# Altium PCB fpga_radio.PcbDoc
Units mm, origin at the board's own origin, x right, y up, seen from the top; angles counter-clockwise.
Board outline 49.47 x 42.23 mm, 4 copper layers (Top Layer, VCC_3_3, VCC_1_5, Bottom Layer); 60 components, 45 nets, 338 pads, 75 vias.
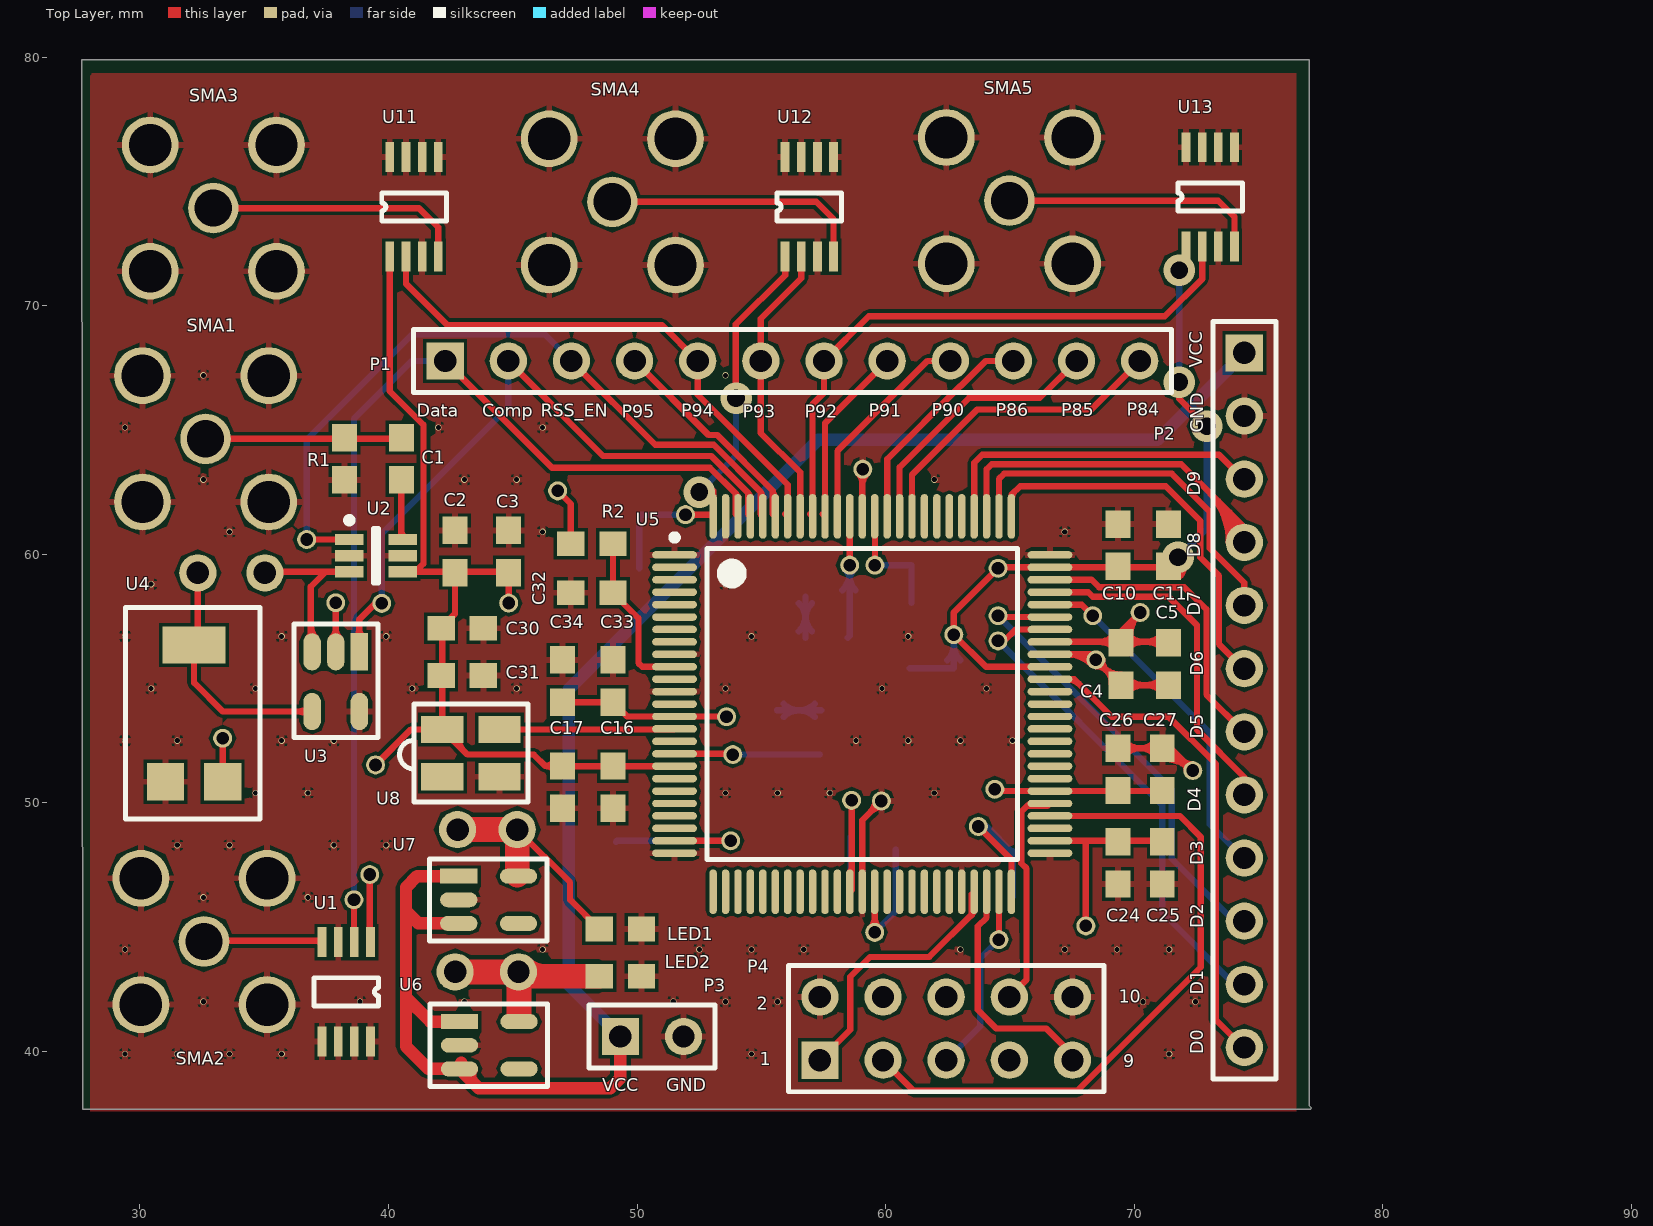
[diagram p0: Top Layer view]
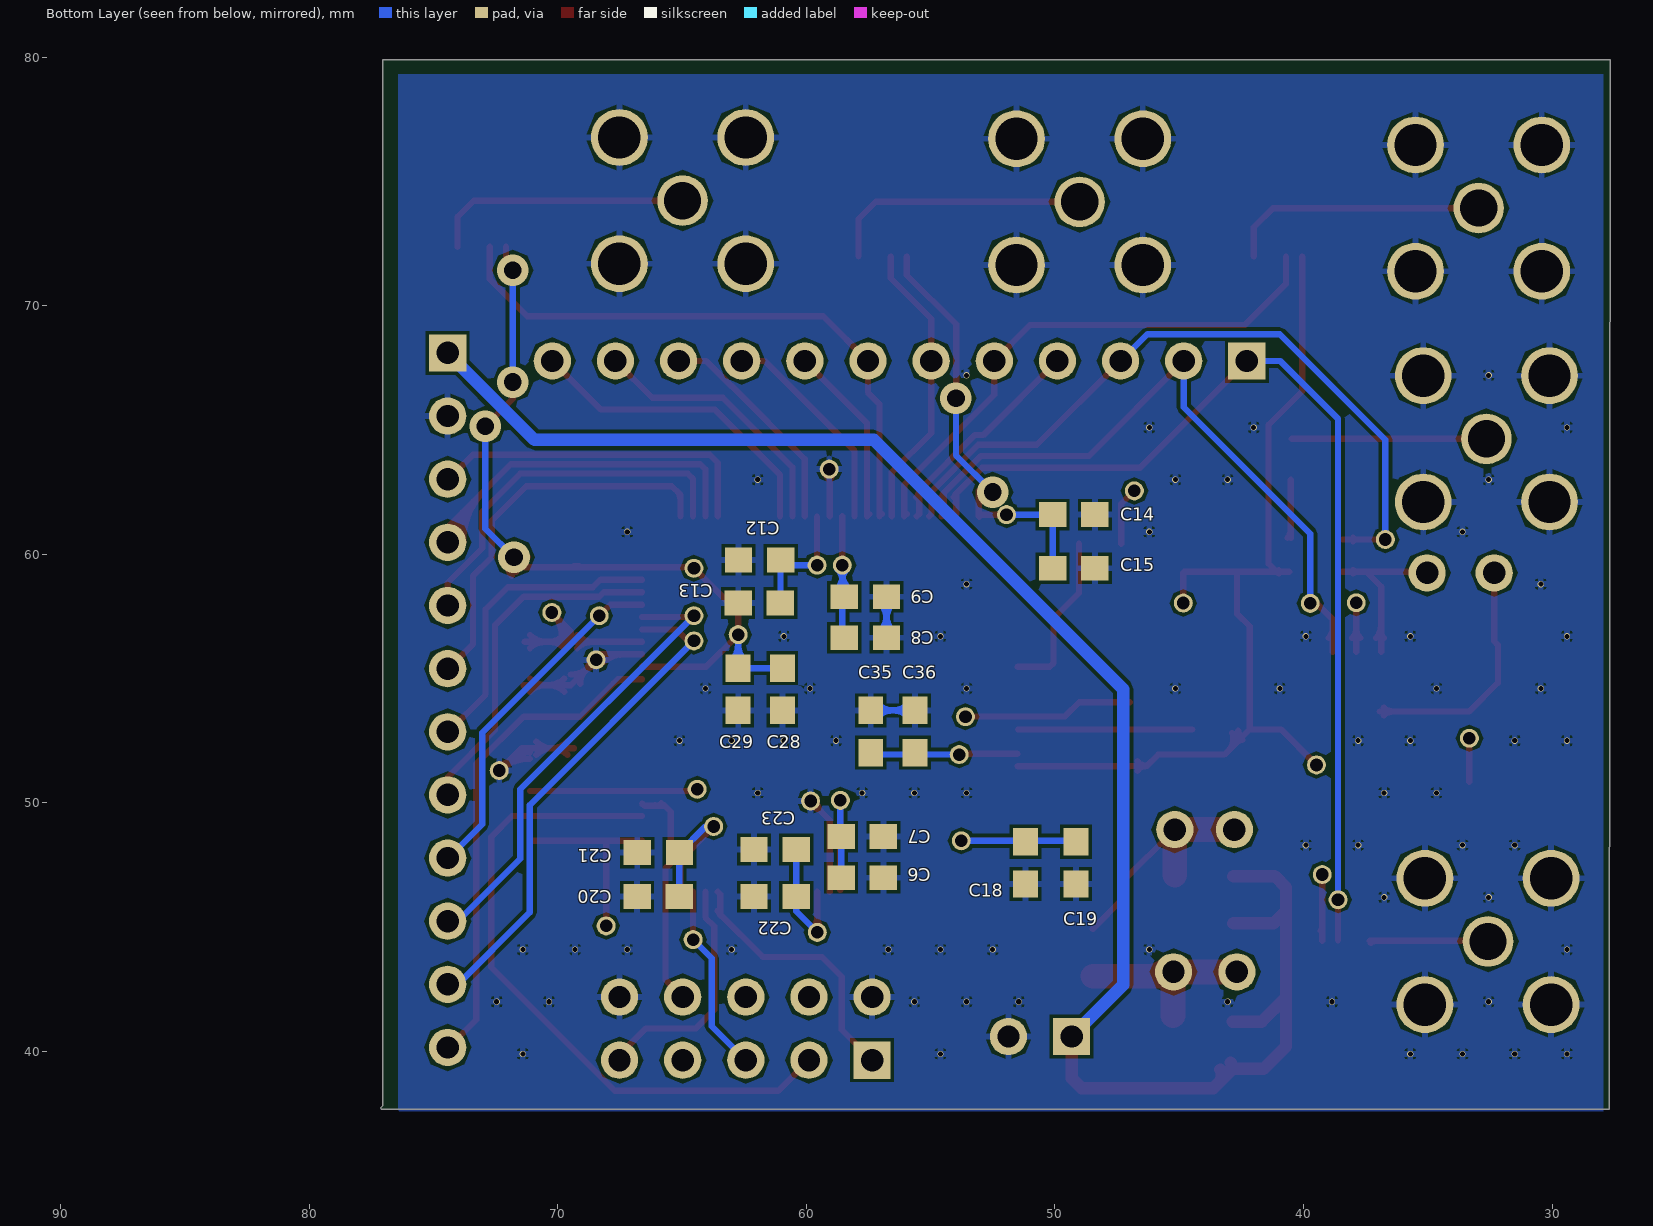
[diagram p1: Bottom Layer view, seen from below]
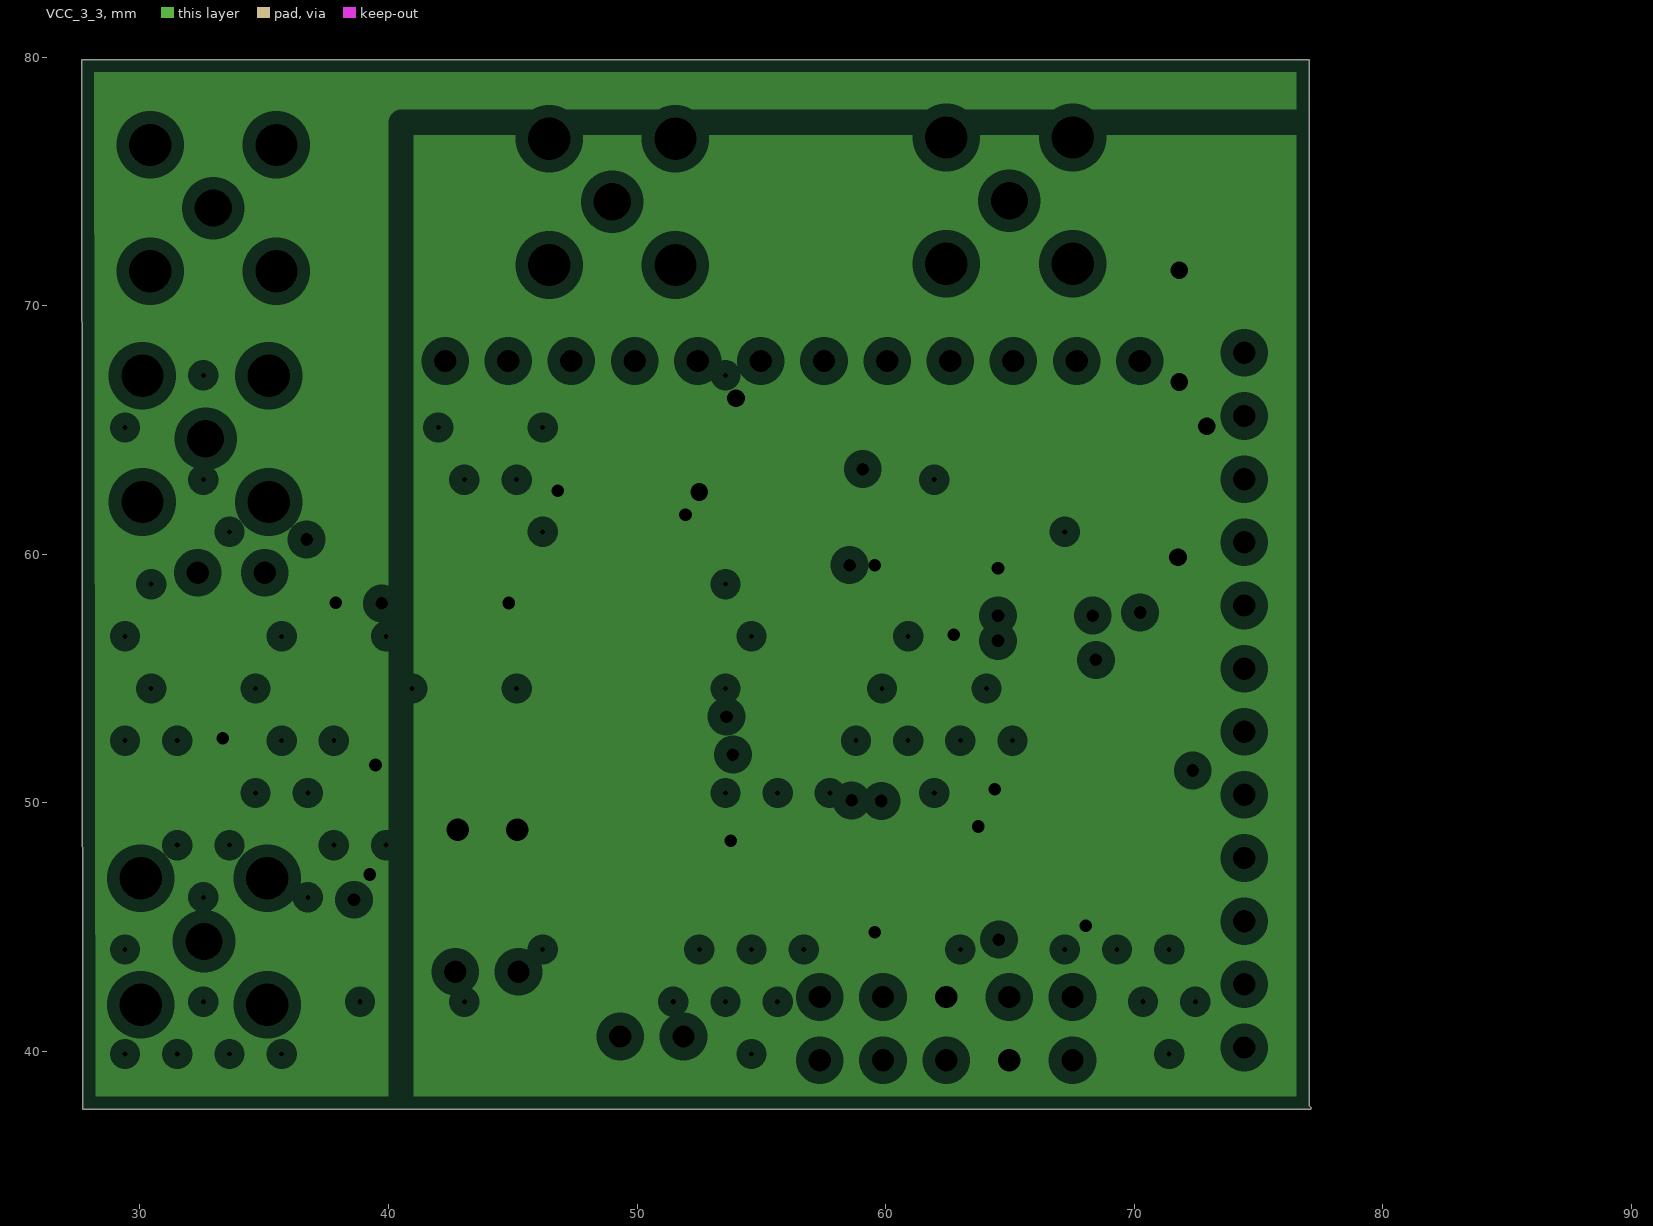
[diagram p2: VCC_3_3, clearances drawn from the general rule]
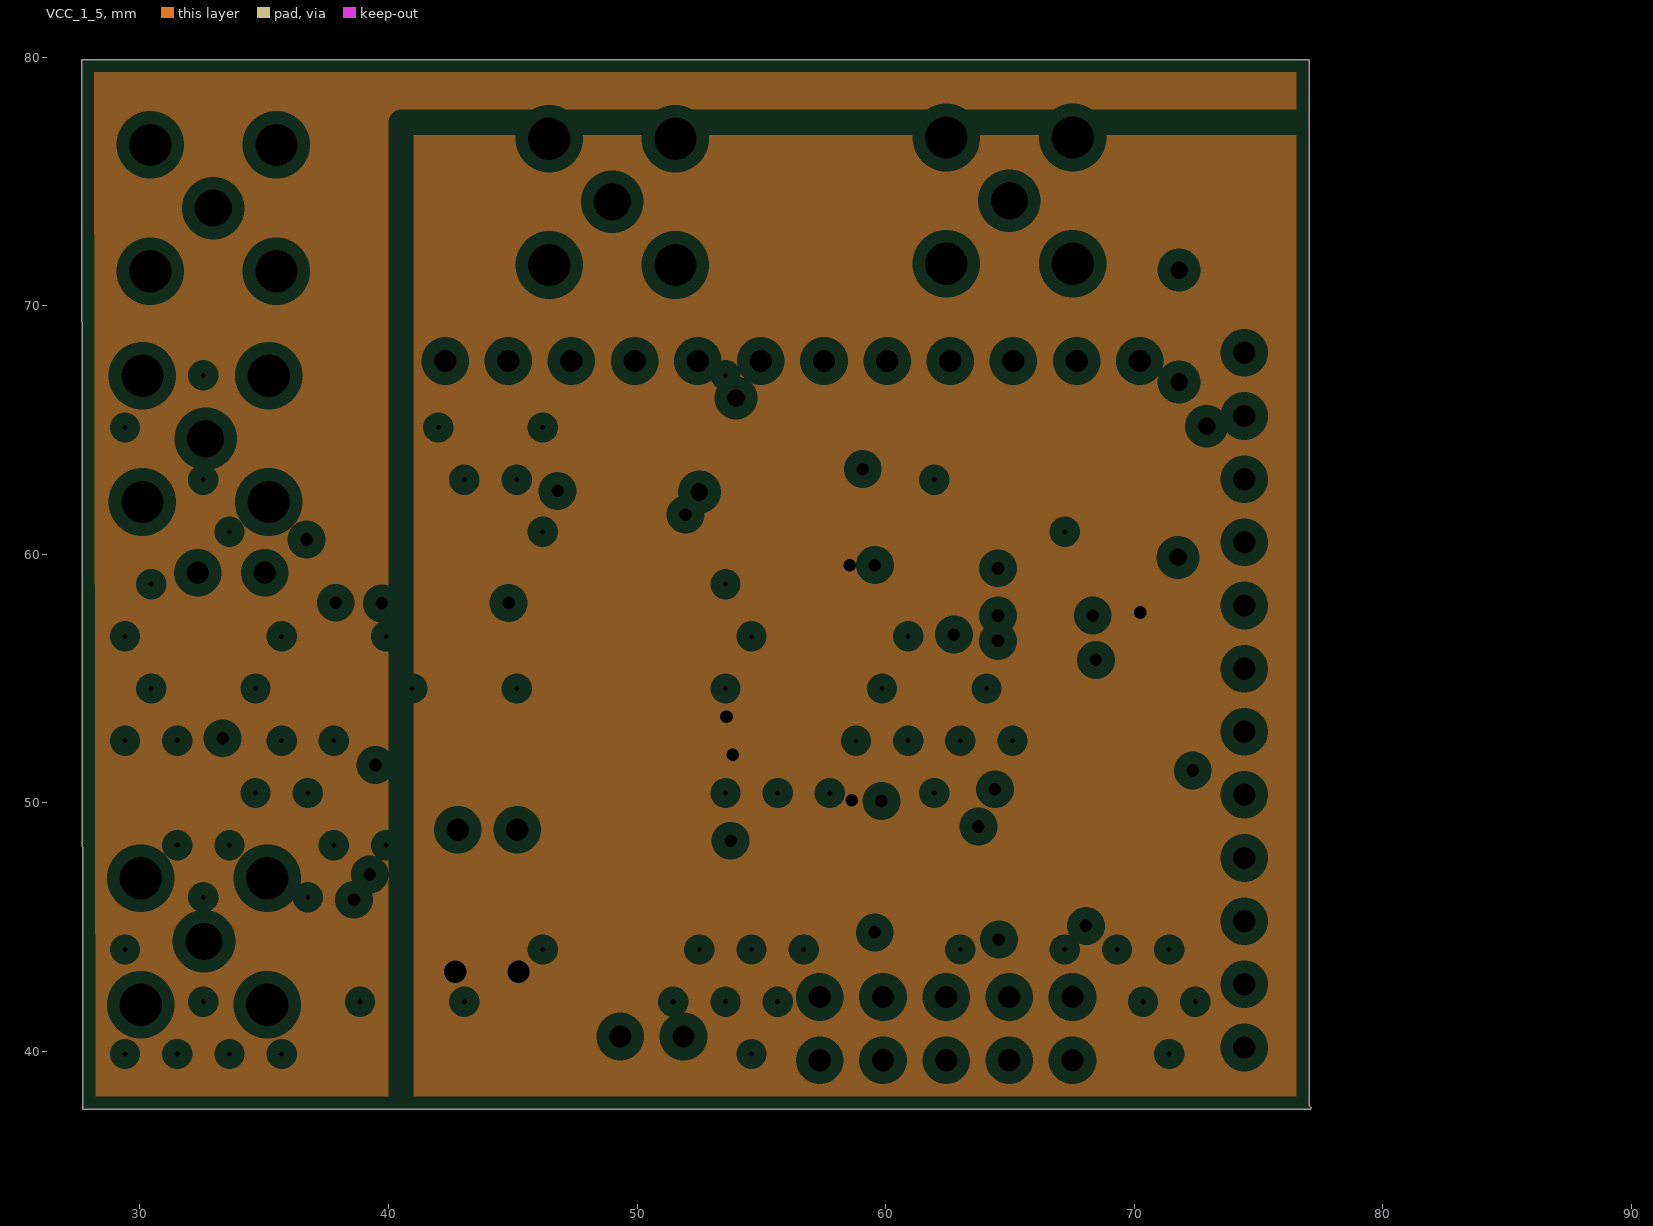
[diagram p3: VCC_1_5, clearances drawn from the general rule]

## Layer stack, top to bottom
Top Layer: signal copper 0.0356
Dielectric: core 0.32, FR-4, Dk 4.8
VCC_3_3: plane copper 0.0356, net VCC_3_3
Dielectric: prepreg 0.32, FR-4, Dk 4.8
VCC_1_5: plane copper 0.0356, net VCC_1_5
Dielectric: core 0.32, FR-4, Dk 4.8
Bottom Layer: signal copper 0.0356

## Board outline
27.7,37.675 77.075,37.675 77.125,37.725 77.025,37.825 77.025,79.9 27.65,79.9

## Design rules (kind name [scope] priority, off if disabled: settings)
Clearance [All] p1: gap=0.127
MinimumSolderMaskSliver [All] p1: minsoldermaskwidth=0.025
PlaneClearance [All] p1: clearance=0.508
PlaneConnect [All] p1: planeconnectstyle=Relief reliefexpansion=0.508 reliefentries=4 reliefconductorwidth=0.254 reliefairgap=0.254
PolygonConnect [All] p1: connectstyle=Relief reliefconductorwidth=0.254 reliefentries=4 polygonreliefangle="90 Angle"
RoutingVias [All] p1: holewidth=0.711 width=1.27 viastyle="Through Hole" minholewidth=0.711 minwidth=1.27 maxholewidth=0.711 maxwidth=1.27
SilkToSilkClearance [All] p1: silktosilkclearance=0.127
SilkscreenOverComponentPads SilkToSolderMaskClearance [IsPad] p1: minsilkscreentomaskgap=0.127
SolderMaskExpansion [All] p1: expansion=0.152
Width [All] p1: maxlimit=2 minlimit=0.254 preferedwidth=0.254
23 further rules are at their usual default settings.

## Classes and differential pairs
component class mimo: SMA3 SMA4 SMA5 U11 U12 U13
component class power: C1 C2 C3 C6 C7 C8 C9 C10 C11 C12 C13 C14 C15 C16 C17 C18 C19 C20 C21 C22 C23 C24 C25 C26 C27 C28 C29 C30 C31 C32 C33 C34 C35 C36 LED1 LED2 P4 R1 R2 SMA1 SMA2 U1 U2 U3 U4 U6 U7 U8
component class io_bank: C4 C5 P1 P2 P3 U5

## Components (designator, comment, footprint, x,y, rotation, side; value= is the part's Value field where it differs from the comment)
C1 "Cap" 0603 40.513,62.992 r90 top
C2 "Cap" 0603 42.672,60.96 r270 top
C3 "Cap" 0603 44.831,60.96 r270 top
C4 "Cap" 0603 69.469,54.737 r90 top
C5 "Cap" 0603 71.374,54.737 r90 top
C6 "Cap" 0603 56.896,46.99 r0 bottom
C7 "Cap" 0603 56.896,48.641 r0 bottom
C8 "Cap" 0603 56.769,56.642 r0 bottom
C9 "Cap" 0603 56.769,58.293 r0 bottom
C10 "Cap" 0603 69.342,61.214 r270 top
C11 "Cap" 0603 71.374,61.214 r270 top
C12 "Cap" 0603 62.725,59.775 r180 bottom
C13 "Cap" 0603 62.738,58.039 r180 bottom
C14 "Cap" 0603 48.387,61.595 r0 bottom
C15 "Cap" 0603 48.387,59.436 r0 bottom
C16 "Cap" 0603 49.022,49.784 r90 top
C17 "Cap" 0603 46.99,49.784 r90 top
C18 "Cap" 0603 51.181,46.736 r90 bottom
C19 "Cap" 0603 49.149,46.736 r90 bottom
C20 "Cap" 0603 66.802,46.228 r180 bottom
C21 "Cap" 0603 66.8,48 r180 bottom
C22 "Cap" 0603 62.103,46.228 r180 bottom
C23 "Cap" 0603 62.1,48.125 r180 bottom
C24 "Cap" 0603 69.342,46.736 r90 top
C25 "Cap" 0603 71.12,46.736 r90 top
C26 "Cap" 0603 69.342,52.197 r270 top
C27 "Cap" 0603 71.12,52.197 r270 top
C28 "Cap" 0603 60.96,53.721 r90 bottom
C29 "Cap" 0603 62.738,53.721 r90 bottom
C30 "Cap" 0603 43.815,57.023 r180 top
C31 "Cap" 0603 43.815,55.118 r180 top
C32 "Cap" 0603 47.325,58.45 r0 top
C33 "Cap" 0603 49.022,55.753 r270 top
C34 "Cap" 0603 46.99,55.753 r270 top
C35 "Cap" 0603 57.404,53.721 r270 bottom
C36 "Cap" 0603 55.626,53.721 r270 bottom
LED1 "LED" 0603 48.475,44.925 r0 top
LED2 "LED" 0603 48.475,43.025 r0 top
P1 "Header 12" HDR1X12 42.275,67.775 r0 top
P2 "Header 12" HDR1X12 74.425,68.1 r270 top
P3 "Header 2" HDR1X2 49.325,40.6 r0 top (schematic designator P5)
P4 "Header 5X2" HDR2X5 57.35,39.65 r0 top
R1 "Res" 0603 38.227,62.992 r90 top
R2 "Res" 0603 49.025,60.425 r180 top
SMA1 "SMA - Hole - 5 Pin" "SMA - Hole - 5 Pin" 32.639,64.643 r0 top
SMA2 "SMA - Hole - 5 Pin" "SMA - Hole - 5 Pin" 32.575,44.425 r0 top
SMA3 "SMA - Hole - 5 Pin" "SMA - Hole - 5 Pin" 32.95,73.925 r0 top
SMA4 "SMA - Hole - 5 Pin" "SMA - Hole - 5 Pin" 49,74.175 r0 top
SMA5 "SMA - Hole - 5 Pin" "SMA - Hole - 5 Pin" 64.975,74.225 r0 top
U1 "adg902" ADG902 39.275,44.4 r270 top
U2 "LT55534" LT5534 39.497,59.944 r0 top
U3 "NCS2200A" NCS2200 38.825,56.075 r270 top
U4 "3314G-1" 3314G-1 33.325,50.85 r180 top
U5 "AGLN250V2-VQ100" VQ100_N 59.055,53.975 r0 top
U6 "TPS73615" TPS73633 42.85,41.2 r0 top
U7 "TPS73633" TPS73633 42.825,47.05 r0 top
U8 "ASTX_H11_20MHz" ASTX_H11 42.164,51.054 r90 top
U11 "adg902" ADG902 40.05,71.975 r90 top
U12 "adg902" ADG902 55.95,71.975 r90 top
U13 "adg902" ADG902 72.075,72.375 r90 top

## Footprints (in the part's own frame and the unit in brackets; to place one, negate y for a bottom-side part, rotate by r counter-clockwise, add the part's x,y. Pads: shape width x height; smd on the part's side, far side on the other; paste and mask are expansions set on the pad)
0603 [mm]
  rect 1.1x1 smd: 1(0,0) 2(1.7,0)
3314G-1 [mm]
  rect 1.5x1.5 smd: 1(0,0) 3(2.3,0)
  rect 2.541x1.5 smd: 2(1.15,-5.5)
  silkscreen extent -1.5,-7 3.9,1.5
ADG902 [mm]
  rect 1.2x0.35 smd: 1(0,0) 2(0,-0.65) 3(0,-1.3) 4(0,-1.95) 5(4,-1.95) 6(4,-1.3) 7(4,-0.65) 8(4,0)
  silkscreen extent 1.43,-2.28 2.57,0.33
ASTX_H11 [mm]
  rect 1.1x1.7 smd: 1(0,0) 2(0,-2.3) 3(1.9,-2.3) 4(1.9,0)
  silkscreen extent -1.02,-3.45 2.92,1.72
HDR1X2 [mm] "Connector; Header; 2 Position"
  rect 1.5x1.5 hole 0.9: 1(0,0)
  round 1.5 hole 0.9: 2(2.54,0)
  silkscreen extent -1.27,-1.27 3.81,1.27
HDR1X12 [mm] "Connector; Header; 12 Position"
  rect 1.5x1.5 hole 0.9: 1(0,0)
  round 1.5 hole 0.9: 2(2.54,0) 3(5.08,0) 4(7.62,0) 5(10.16,0) 6(12.7,0) 7(15.24,0) 8(17.78,0) 9(20.32,0) 10(22.86,0) 11(25.4,0) 12(27.94,0)
  silkscreen extent -1.27,-1.27 29.21,1.27
HDR2X5 [mm] "Connector; Header; 5x2 Position"
  rect 1.5x1.5 hole 0.9: 1(0,0)
  round 1.5 hole 0.9: 2(0,2.54) 3(2.54,0) 4(2.54,2.54) 5(5.08,0) 6(5.08,2.54) 7(7.62,0) 8(7.62,2.54) 9(10.16,0) 10(10.16,2.54)
  silkscreen extent -1.27,-1.27 11.43,3.81
LT5534 [mm] "SOT23, 6-Leads, Body 2.00x2.55mm, Pitch 0.65mm, IPC Medium Density"
  rect 1.15x0.45 smd: 1(-1.075,0.65) 2(-1.075,0) 3(-1.075,-0.65) 4(1.075,-0.65) 5(1.075,0) 6(1.075,0.65)
  silkscreen extent -1.2,-1.1 0.1,1.55, body extent -0.67,-1.1 0.67,1.1, height 1.1
NCS2200 [mm]
  rect 1.5x0.7 smd: 1(0,0)
  oval 1.5x0.7 smd: 2(0,-0.95) 3(0,-1.9) 4(2.4,-1.9) 5(2.4,0)
  silkscreen extent -1.12,-2.63 3.45,0.75
"SMA - Hole - 5 Pin" [mil] "SMA Through Hole Connector"
  round 90 hole 67: 1(-100,-100) 1(-100,100) 1(100,-100) 1(100,100)
  round 80 hole 59.06: 2(0,0)
TPS73633 [mm]
  rect 1.5x0.6 smd: 1(0,0)
  oval 1.5x0.6 smd: 2(0,-0.95) 3(0,-1.9) 4(2.4,-1.9) 5(2.4,0)
  silkscreen extent -1.17,-2.6 3.55,0.7
VQ100_N [mm] "Thin QFP, 100-Leads, Body 14x14mm, Pitch 0.5mm, IPC Medium Density"
  oval 1.8x0.3 smd: 1(-7.55,6) 2(-7.55,5.5) 3(-7.55,5) 4(-7.55,4.5) 5(-7.55,4) 6(-7.55,3.5) 7(-7.55,3) 8(-7.55,2.5) 9(-7.55,2) 10(-7.55,1.5) 11(-7.55,1) 12(-7.55,0.5) 13(-7.55,0) 14(-7.55,-0.5) 15(-7.55,-1) 16(-7.55,-1.5) 17(-7.55,-2) 18(-7.55,-2.5) 19(-7.55,-3) 20(-7.55,-3.5) 21(-7.55,-4) 22(-7.55,-4.5) 23(-7.55,-5) 24(-7.55,-5.5) 25(-7.55,-6) 51(7.55,-6) 52(7.55,-5.5) 53(7.55,-5) 54(7.55,-4.5) 55(7.55,-4) 56(7.55,-3.5) 57(7.55,-3) 58(7.55,-2.5) 59(7.55,-2) 60(7.55,-1.5) 61(7.55,-1) 62(7.55,-0.5) 63(7.55,0) 64(7.55,0.5) 65(7.55,1) 66(7.55,1.5) 67(7.55,2) 68(7.55,2.5) 69(7.55,3) 70(7.55,3.5) 71(7.55,4) 72(7.55,4.5) 73(7.55,5) 74(7.55,5.5) 75(7.55,6)
  oval 0.3x1.8 smd: 26(-6,-7.55) 27(-5.5,-7.55) 28(-5,-7.55) 29(-4.5,-7.55) 30(-4,-7.55) 31(-3.5,-7.55) 32(-3,-7.55) 33(-2.5,-7.55) 34(-2,-7.55) 35(-1.5,-7.55) 36(-1,-7.55) 37(-0.5,-7.55) 38(0,-7.55) 39(0.5,-7.55) 40(1,-7.55) 41(1.5,-7.55) 42(2,-7.55) 43(2.5,-7.55) 44(3,-7.55) 45(3.5,-7.55) 46(4,-7.55) 47(4.5,-7.55) 48(5,-7.55) 49(5.5,-7.55) 50(6,-7.55) 76(6,7.55) 77(5.5,7.55) 78(5,7.55) 79(4.5,7.55) 80(4,7.55) 81(3.5,7.55) 82(3,7.55) 83(2.5,7.55) 84(2,7.55) 85(1.5,7.55) 86(1,7.55) 87(0.5,7.55) 88(0,7.55) 89(-0.5,7.55) 90(-1,7.55) 91(-1.5,7.55) 92(-2,7.55) 93(-2.5,7.55) 94(-3,7.55) 95(-3.5,7.55) 96(-4,7.55) 97(-4.5,7.55) 98(-5,7.55) 99(-5.5,7.55) 100(-6,7.55)
  silkscreen extent -7.67,-6.25 6.25,6.82, body extent -7,-7 7,7, height 1.2

## Part data
C1 C2 C3 C4 C5 C6 C7 C8 C9 C10 C11 C12 C13 C14 C15 C16 C17 C18 C19 C20 C21 C22 C23 C24 C25 C26 C27 C28 C29 C30 C31 C32 C33 C34 C35 C36: "Ceramic Capacitor (Surface Mount)"
P1 P2: "Header, 12-Pin"
P3: "Header, 2-Pin"
P4: "Header, 5-Pin, Dual row"
R1 R2: "Chip Resistor (Surface Mount)"
SMA1 SMA2 SMA3 SMA4 SMA5: "SMA - Through Hole Connector"
U5: "IGLOO nano Low-Power Flash 1.2 to 1.5V FPGA with Flash*Freeze, 68 User IOs, 250K System Gates, 1Kbit Flash ROM, 100-Pin TQFP, Commercial Grade"

## Free pads (board coordinates)
  round 0.762 hole 0.508: 0(33.325,52.6) 0(53.848,51.943) 2(39.725,58.025) 2(53.76,48.475) 3(51.943,61.595) 4(58.625,50.1) 5(59.555,44.79) 6(63.725,49.05) 8(58.547,59.563) 9(59.075,63.425) 9(59.563,59.563) 10(68.326,57.531) 11(64.516,57.531) 12(64.516,56.515) 13(38.608,46.101) 15(44.831,58.039) 16(46.8,62.55) 17(37.875,58.05) 18(39.475,51.525) 19(39.243,47.117) 21(64.516,59.436) 22(70.231,57.658) 23(64.389,50.546) 24(64.55,44.5) 24(68.05,45.05) 26(53.594,53.467) 29(72.35,51.3) 30(68.453,55.753) 31(36.703,60.594) 33(62.738,56.769) 35(59.825,50.075)
  round 1.5 hole 0.9: 3(35.025,59.25) 20(42.775,48.925) 20(45.175,48.925) 25(42.675,43.2) 25(45.225,43.2) 34(32.325,59.25)

## Via types
v1: diameter 0.254, hole 0.203, Top Layer to Bottom Layer, 69 vias
v2: diameter 1.27, hole 0.711, Top Layer to Bottom Layer, 6 vias

## Nets (pads, with @x,y where several pads share a name; then routed paths per layer and width w, separated by ;. In a path a pad name is that pad's centre, name@x,y a point inside that pad or via, vN(x,y) a via of type N, cw(c..) or ccw(c..) an arc to the next point about the centre after c; other vN are vias at no path point)
GND: C2.1 C3.1 C4.1 C5.1 C6.1 C7.1 C8.1 C9.1 C10.1 C11.1 C12.1 C13.1 C14.1 C15.1 C16.1 C17.1 C18.1 C19.1 C20.1 C21.1 C22.1 C23.1 C24.1 C25.1 C26.1 C27.1 C28.1 C29.1 C30.1 C31.1 C32.1 C33.1 C34.1 C35.1 C36.1 LED1.2 LED2.2 P2.2 P3.2 P4.2 P4.10 pad.9@59.075,63.425 pad.29 pad.30 pad.35 R1.1 SMA1.1 SMA2.1 SMA3.1 SMA4.1 SMA5.1 U1.3 U1.5 U1.6 U1.7 U1.8 U2.2 U2.5 U3.5 U4.3 U5.1 U5.9 U5.12 U5.25 U5.38 U5.46 U5.51 U5.67 U5.75 U5.88 U5.99 U6.2 U7.2 U8.2 U11.3 U11.5 U11.6 U11.7 U11.8 U12.3 U12.5 U12.6 U12.7 U12.8 U13.3 U13.5 U13.6 U13.7 U13.8 | length 38.6
  Top Layer w0.254: pad.9@58.895,63.245 cw(c58.51,62.86) 59.055,62.86 ; U5.38 59.055,49.305 pad.35 ; U5.88 59.055,63.405 pad.9@59.075,63.425 ; 59.055,62.764 cw(c59.736,62.764) pad.9@59.255,63.245 ; pad.35@59.571,50.075 cw(c58.958,50.075) 59.391,49.641 cw(c59.825,49.208) pad.35@59.825,49.821 ; U5.67 68.231,55.975 C4.1 C5.1 ; U5.67@67.304,55.975 cw(c67.304,54.604) pad.30@68.273,55.573 ; 67.917,55.975 cw(c67.917,55.217) pad.30 ; pad.30@68.453,55.499 cw(c68.453,54.886) 68.887,55.319 cw(c69.32,55.753) pad.30@68.707,55.753 ; 68.747,55.459 ccw(c69.469,56.181) C4.1@69.469,55.16 ; 68.868,55.338 cw(c68.316,54.787) C4.1@69.096,54.787 ; C26.1 C27.1 71.453,52.197 pad.29 ; C26.1@69.606,51.933 cw(c70.242,51.297) 70.242,52.197 cw(c70.242,53.097) C26.1@69.606,52.461 ; C4.1@69.733,54.473 cw(c70.369,53.837) 70.369,54.737 cw(c70.369,55.637) C4.1@69.733,55.001 ; C27.1@70.856,51.933 ccw(c70.22,51.297) 70.22,52.197 ccw(c70.22,53.097) C27.1@70.856,52.461 ; C5.1@71.11,54.473 ccw(c70.474,53.837) 70.474,54.737 ccw(c70.474,55.637) C5.1@71.11,55.001 ; C27.1@71.12,51.774 cw(c71.12,49.949) pad.29@72.411,51.239 ; C27.1@71.12,52.028 cw(c71.12,50.816) 71.977,51.673 ; pad.29@72.096,51.3 ccw(c71.483,51.3) 71.916,51.734 ccw(c72.35,52.167) pad.29@72.35,51.554
  Bottom Layer w0.254: C36.1 C35.1 ; C36.1@55.89,53.457 cw(c56.526,52.821) 56.526,53.721 cw(c56.526,54.621) C36.1@55.89,53.985 ; C8.1@56.505,56.906 ccw(c55.869,57.542) 56.769,57.542 ccw(c57.669,57.542) C8.1@57.033,56.906 ; C9.1@56.505,58.029 cw(c55.869,57.393) 56.769,57.393 cw(c57.669,57.393) C9.1@57.033,58.029 ; C8.1 C9.1 ; C35.1@57.14,53.457 ccw(c56.504,52.821) 56.504,53.721 ccw(c56.504,54.621) C35.1@57.14,53.985
  other v1: 29.4,39.9 31.5,39.9 33.6,39.9 35.7,39.9 54.6,39.9 71.4,39.9 32.55,42 38.85,42 43.05,42 51.45,42 53.55,42 55.65,42 70.35,42 72.45,42 29.4,44.1 46.2,44.1 52.5,44.1 54.6,44.1 56.7,44.1 63,44.1 67.2,44.1 69.3,44.1 71.4,44.1 32.55,46.2 36.75,46.2 31.5,48.3 33.6,48.3 37.8,48.3 39.9,48.3 34.65,50.4 36.75,50.4 53.55,50.4 55.65,50.4 57.75,50.4 61.95,50.4 29.4,52.5 31.5,52.5 35.7,52.5 37.8,52.5 58.8,52.5 60.9,52.5 63,52.5 65.1,52.5 30.45,54.6 34.65,54.6 40.95,54.6 45.15,54.6 53.55,54.6 59.85,54.6 64.05,54.6 29.4,56.7 35.7,56.7 39.9,56.7 54.6,56.7 60.9,56.7 30.45,58.8 53.55,58.8 33.6,60.9 46.2,60.9 67.2,60.9 32.55,63 43.05,63 45.15,63 61.95,63 29.4,65.1 42,65.1 46.2,65.1 32.55,67.2 53.55,67.2
NetC1_1: C1.1 U2.6 | length 2.7
  Top Layer w0.254: U2.6@40.513,60.653 C1.1 ; 40.513,60.973 ccw(c40.951,60.973) U2.6@40.641,60.663
NetC1_2: C1.2 R1.2 SMA1.2 | length 7.8
  Top Layer w0.254: SMA1.2 C1.2@40.464,64.643
NetC32_2: C32.2 R2.1 U5.10 | length 6.7
  Top Layer w0.254: R2.1 C32.2 50.05,57.425 50.05,55.625 50.2,55.475 U5.10
NetP1_1: P1.1 pad.13 U1.2 U5.98 | length 41.1
  Top Layer w0.254: U1.2@38.608,44.465 pad.13 ; P1.1 46.575,63.475 52.926,63.475 53.959,62.442 ; U5.98@53.959,62.085 ccw(c53.989,62.085) U5.98@53.979,62.057 ; U5.98 53.959,61.621 53.959,62.442 ; U5.98@54.063,62.297 cw(c54.113,62.442) 53.959,62.442 ; 53.965,62.436 cw(c53.804,62.275) 54.032,62.275 ccw(c53.804,62.275) 53.965,62.436
  Bottom Layer w0.254: pad.13 38.608,65.458 40.925,67.775 P1.1
NetP1_2: P1.2 pad.2@39.725,58.025 U3.1 U5.97 | length 28.7
  Top Layer w0.254: U3.1@38.667,56.633 ccw(c38.287,57.013) 38.825,57.013 ccw(c39.363,57.013) U3.1@38.983,56.633 ; U3.1 38.825,57.375 39.475,58.025 pad.2@39.725,58.025 ; P1.2 48.64,63.95 52.99,63.95 54.459,62.481 ; U5.97 54.459,61.621 54.459,62.481 ; U5.97@54.567,62.295 cw(c54.674,62.481) 54.459,62.481 ; 54.438,62.502 cw(c54.211,62.275) 54.532,62.275 ccw(c54.211,62.275) 54.438,62.502
  Bottom Layer w0.254: pad.2@39.725,58.025 39.725,60.825 44.815,65.915 P1.2
NetP1_3: P1.3 pad.31 U2.1 U5.96 | length 30.7
  Top Layer w0.254: pad.31 U2.1 ; U2.1@38.003,60.525 ccw(c37.835,60.357) 37.835,60.594 ccw(c37.835,60.831) U2.1@38.003,60.663 ; P1.3 50.73,64.4 53.079,64.4 54.959,62.52 ; U5.96 54.959,61.621 54.959,62.52 ; U5.96@55.069,62.293 cw(c55.248,62.52) 54.959,62.52 ; 54.91,62.569 cw(c54.617,62.275) 55.032,62.275 ccw(c54.617,62.275) 54.91,62.569
  Bottom Layer w0.254: pad.31 36.703,64.603 40.955,68.855 46.275,68.855 P1.3
NetP1_4: P1.4 U5.95 | length 9.1
  Top Layer w0.254: P1.4 52.87,64.8 53.218,64.8 55.459,62.559 ; U5.95 55.459,61.621 55.459,62.559 ; U5.95@55.571,62.291 cw(c55.834,62.559) 55.459,62.559
NetP1_5: P1.5 U5.94 U11.2 | length 22
  Top Layer w0.254: U11.2 40.7,70.875 42.35,69.225 50.985,69.225 P1.5 52.435,66.415 56.055,62.795 U5.94 U5.94@55.959,61.621
NetP1_6: P1.6 U5.93 U12.2 | length 11.8
  Top Layer w0.254: U5.93 56.555,63.295 54.975,64.875 P1.6 54.975,69.475 56.6,71.1 U12.2
NetP1_7: P1.7 U5.92 U13.2 | length 24.5
  Top Layer w0.254: U5.92@56.959,61.621 U5.92 57.055,66.045 57.515,66.505 P1.7 59.315,69.575 71.225,69.575 72.725,71.075 U13.2
NetP1_8: P1.8 U5.91 | length 7.4
  Top Layer w0.254: U5.91@57.459,61.621 U5.91 57.555,65.275 P1.8
NetP1_9: P1.9 U5.90 | length 8.7
  Top Layer w0.254: U5.90 58.055,64.155 61.675,67.775 P1.9
NetP1_10: P1.10 U5.86 | length 9
  Top Layer w0.254: U5.86 60.055,63.83 62.996,66.771 63.011,66.771 64.015,67.775 P1.10
NetP1_11: P1.11 U5.85 | length 10.9
  Top Layer w0.254: U5.85 60.555,63.505 63.35,66.3 66.2,66.3 P1.11
NetP1_12: P1.12 U5.84 | length 12.7
  Top Layer w0.254: U5.84 61.055,63.205 63.675,65.825 68.265,65.825 P1.12
NetP2_3: P2.3 U5.79 | length 13.6
  Top Layer w0.254: U5.79 63.555,63.682 63.881,64.008 73.406,64.008 P2.3@74.422,62.992
NetP2_4: P2.4 U5.78 | length 20.5
  Top Layer w0.254: U5.78 64.055,63.42 64.262,63.627 71.882,63.627 74.422,61.087 P2.4@74.422,60.452 ; 72.934,62.575 cw(c70.84,60.48) P2.4@73.802,60.48 ; 73.368,62.141 cw(c71.707,60.48) P2.4@74.056,60.48 ; 73.802,61.707 cw(c72.574,60.48) P2.4@74.31,60.48 ; 74.235,61.274 cw(c73.441,60.48) P2.4@74.564,60.48
NetP2_5: P2.5 U5.77 | length 15.1
  Top Layer w0.254: U5.77 64.555,63.031 64.77,63.246 71.501,63.246 73.037,61.71 73.037,60.238 74.422,58.853 P2.5@74.422,57.912
NetP2_6: P2.6 U5.76 | length 16.1
  Top Layer w0.254: U5.76 65.055,62.388 65.405,62.738 71.259,62.738 72.656,61.341 72.656,59.878 73.406,59.128 73.406,56.388 P2.6@74.422,55.372 ; U5.76@65.078,62.275 cw(c65.406,62.275) 65.174,62.507
NetP2_7: P2.7 U5.73 | length 12.4
  Top Layer w0.254: U5.73 68.279,58.975 68.58,58.674 72.009,58.674 72.898,57.785 72.898,54.356 P2.7@74.422,52.832
NetP2_8: P2.8 U5.72 | length 14.1
  Top Layer w0.254: U5.72 68.144,58.475 68.326,58.293 71.374,58.293 72.517,57.15 72.517,52.936 74.422,51.031 P2.8@74.422,50.292
NetP2_9: P2.9 pad.10 U5.71 | length 14.2
  Top Layer w0.254: U5.71 67.882,57.975 pad.10
  Bottom Layer w0.254: pad.10 73.037,52.82 73.037,49.137 P2.9@74.422,47.752
NetP2_10: P2.10 pad.11 U5.70 | length 18.7
  Top Layer w0.254: pad.11@64.572,57.475 U5.70
  Bottom Layer w0.254: pad.11 71.501,50.546 71.501,47.752 74.041,45.212 P2.10@74.422,45.212
NetP2_11: P2.11 pad.12 U5.69 | length 20.4
  Top Layer w0.254: pad.12 64.77,56.515 65.23,56.975 U5.69
  Bottom Layer w0.254: pad.12 71.12,49.911 71.12,45.593 74.041,42.672 P2.11@74.422,42.672
NetP2_12: P2.12 U5.65 | length 20.8
  Top Layer w0.254: U5.65 67.58,54.975 69.088,53.467 71.374,53.467 73.275,51.566 73.275,41.279 P2.12@74.422,40.132 ; U5.65@67.355,54.952 cw(c67.355,54.353) 67.778,54.777 ; U5.65@67.361,54.953 cw(c67.448,54.618) 67.692,54.863
NetP4_1: P4.1 U5.47 | length 11.1
  Top Layer w0.254: P4.1 58.575,40.875 58.575,43 59.378,43.803 61.754,43.803 63.459,45.508 63.459,46.329 U5.47 ; 63.459,45.482 cw(c63.652,45.482) U5.47@63.565,45.654 ; 63.465,45.514 ccw(c63.304,45.675) U5.47@63.532,45.675
NetP4_3: P4.3 U5.54 | length 27
  Top Layer w0.254: P4.3 61.115,38.425 67.705,38.425 72.675,43.395 72.675,48.627 71.827,49.475 U5.54
NetP4_5: P4.5 pad.24@64.55,44.5 U5.49 | length 7.7
  Top Layer w0.254: pad.24@64.555,44.5 U5.49
  Bottom Layer w0.254: P4.5 63.8,41.02 63.8,43.75 pad.24@64.55,44.5
NetP4_8: P4.8 U5.55 | length 9.7
  Top Layer w0.254: P4.8 65.659,42.879 65.659,47.363 65.451,47.571 65.451,49.642 65.688,49.879 ; U5.55@65.833,49.983 cw(c65.688,50.033) 65.688,49.879 ; U5.55@66.045,49.879 ccw(c66.045,49.909) U5.55@66.073,49.899 ; U5.55 66.509,49.879 65.688,49.879 ; 65.694,49.885 cw(c65.855,49.724) 65.855,49.952 ccw(c65.855,49.724) 65.694,49.885
NetP4_9: P4.9 U5.48 | length 9.7
  Top Layer w0.254: U5.48 64.055,45.386 63.7,45.031 63.7,41.675 64.45,40.925 66.45,40.925 67.51,39.865 P4.9
NetSMA2_2: SMA2.2 U1.4 | length 5
  Top Layer w0.254: SMA2.2@32.575,44.45 U1.4@37.338,44.45 ; 37.088,44.45 cw(c37.088,44.163) U1.4@37.291,44.366
NetSMA3_2: SMA3.2 U11.4 | length 10.5
  Top Layer w0.254: SMA3.2 41.225,73.925 42,73.15 U11.4
NetSMA4_2: SMA4.2 U12.4 | length 10.7
  Top Layer w0.254: SMA4.2 57.2,74.175 57.9,73.475 U12.4
NetSMA5_2: SMA5.2 U13.4 | length 10.5
  Top Layer w0.254: SMA5.2 73.375,74.225 74.025,73.575 U13.4
NetU2_3: pad.3@35.025,59.25 U2.3 U3.3 | length 8.1
  Top Layer w0.254: pad.3@35.025,59.25 35.069,59.294 37.469,59.294 ; U3.3@36.767,56.633 ccw(c36.507,56.893) 36.875,56.893 ; U3.3@36.875,56.075 36.875,58.7 37.469,59.294 ; 36.875,57.134 ccw(c37.584,57.134) U3.3@37.083,56.633 ; U2.3@38.003,59.225 ccw(c37.835,59.057) 37.835,59.294 ccw(c37.835,59.531) U2.3@38.003,59.363 ; U2.3 37.469,59.294
NetU3_4: pad.34 U3.4 U4.2 | length 10.6
  Top Layer w0.254: pad.34 32.325,56.5 U4.2 32.175,54.825 33.325,53.675 34.377,53.675 U3.4 ; U3.4@36.767,53.517 ccw(c36.387,53.137) 36.387,53.675 ccw(c36.387,54.213) U3.4@36.767,53.833
NetU5_15: U5.15 U8.3 | length 7
  Top Layer w0.254: U8.3 U5.15@51.484,52.954
NetU5_80: U5.80
NetU5_81: U5.81
NetU5_82: U5.82
NetU5_83: U5.83
VCC: P2.1 P3.1 U6.1 U6.3 U7.1 U7.3 | length 73.3
  Top Layer w0.5: U7.3 41.2,45.15 40.7,45.65 ; U7.1 41.15,47.05 40.7,46.6 40.7,45.65 ; U6.1 41.675,41.2 40.7,42.175 ; U6.3@42.92,39.541 ccw(c43.158,39.39) U6.3@42.959,39.191 ; U6.3@43.342,39.273 ccw(c43.698,39.048) 43.4,38.75 ; P3.1 49.325,38.925 48.925,38.525 43.625,38.525 U6.3 41.6,39.3 40.7,40.2 40.7,42.175 ; 40.7,42.175 40.7,45.65
  Bottom Layer w0.5: P3.1 47.25,42.675 47.25,54.575 57.275,64.6 70.925,64.6 P2.1
VCC_1_5: C4.2 C5.2 C6.2 C7.2 C8.2 C9.2 C33.2 C34.2 C35.2 C36.2 LED2.1 pad.0@53.848,51.943 pad.4 pad.8 pad.22 pad.25 pad.26 U5.14 U5.17 U5.37 U5.68 U5.89 U6.5 | length 47.8
  Top Layer w0.254: C34.2 C33.2 49.6,53.475 U5.14 53.586,53.475 pad.26 ; U5.17 pad.0@53.816,51.975 ; U5.37@58.539,47.191 ccw(c58.33,47.4) 58.625,47.4 ; pad.8@58.555,59.571 U5.89 ; U5.37@58.625,46.495 pad.4 ; U5.68 C4.2@69.469,56.475 ; 68.54,56.475 ccw(c68.54,57.416) C4.2@69.205,56.751 ; 68.597,56.475 cw(c68.597,55.615) C4.2@69.205,56.223 ; C4.2 C4.2@69.469,56.475 ; C4.2@69.587,56.501 cw(c70.535,56.612) 69.86,57.287 ; C4.2@69.733,56.223 cw(c70.341,55.615) 70.341,56.475 ; C4.2@69.733,56.751 ccw(c70.398,57.416) 70.398,56.475 ; C4.2@69.839,56.531 cw(c71.199,56.69) pad.22 69.469,56.896 C4.2@69.469,56.475 ; 70.445,56.475 ccw(c70.445,57.416) C5.2@71.11,56.751 ; 70.502,56.475 cw(c70.502,55.615) C5.2@71.11,56.223 ; C5.2@71.336,56.475 C4.2@69.469,56.475
  Top Layer w1: pad.25@42.675,43.2 pad.25@45.225,43.2 ; U6.5@45.25,41.45 pad.25@45.25,43.175 ; pad.25@45.4,43.025 LED2.1 ; pad.25@45.402,43.377 ccw(c46.251,44.226) 46.251,43.025
  Bottom Layer w0.254: pad.0@53.848,51.943 C35.2@57.355,51.943 ; C9.2@58.255,58.557 ccw(c57.551,59.261) pad.8@58.547,59.261 ; pad.8@58.367,59.383 cw(c57.934,58.95) 58.547,58.95 cw(c59.16,58.95) pad.8@58.727,59.383 ; C8.2 58.547,56.72 pad.8 ; 58.547,59.126 ccw(c59.352,59.126) C9.2@58.783,58.557 ; C6.2 C7.2 ; C7.2@58.625,48.67 pad.4
VCC_3_3: C2.2 C3.2 C10.2 C11.2 C12.2 C13.2 C14.2 C15.2 C16.2 C17.2 C18.2 C19.2 C20.2 C21.2 C22.2 C23.2 C24.2 C25.2 C26.2 C27.2 C28.2 C29.2 C30.2 C31.2 LED1.1 P4.6 P4.7 pad.0@33.325,52.6 pad.2@53.76,48.475 pad.3@51.943,61.595 pad.5 pad.6 pad.9@59.563,59.563 pad.15 pad.16 pad.17 pad.18 pad.19 pad.20 pad.21 pad.23 pad.24@68.05,45.05 pad.33 R2.2 U1.1 U2.4 U3.2 U4.1 U5.18 U5.24 U5.39 U5.50 U5.52 U5.56 U5.66 U5.74 U5.87 U5.100 U7.5 U8.4 U11.1 U12.1 U13.1 | length 156
  Top Layer w0.254: U4.1 pad.0@33.325,52.6 ; U3.2@37.717,56.633 ccw(c37.337,57.013) 37.875,57.013 ccw(c38.413,57.013) U3.2@38.033,56.633 ; U3.2 pad.17 ; U1.1@39.243,44.45 pad.19 ; 39.243,45.018 ccw(c39.468,45.018) U1.1@39.309,44.859 ; pad.18 40.904,52.954 U8.4 ; U11.1 40.05,66.564 41.401,65.213 41.401,59.614 41.081,59.294 U2.4 C3.2@44.797,59.294 ; U2.4@40.991,59.225 cw(c41.159,59.057) 41.159,59.294 cw(c41.159,59.531) U2.4@40.991,59.363 ; U8.4@42.464,52.531 cw(c42.464,52.234) U8.4@42.674,52.444 ; U8.4@42.623,52.897 ccw(c43.094,52.73) 42.741,52.377 ; C2.2 42.672,57.609 42.164,57.101 U8.4 ; U8.4@42.863,52.812 ccw(c43.513,52.581) 43.025,52.093 ; pad.15 C3.2 ; pad.20@45.175,48.925 47.3,46.8 47.3,46.1 LED1.1 ; C17.2@46.676,51.282 ccw(c46.306,51.043) 46.306,51.484 ; C17.2@46.676,51.686 cw(c46.306,51.925) 46.306,51.484 ; pad.16 47.325,62.025 R2.2 ; C17.2 46.306,51.484 ; C17.2@46.999,51.475 U5.18 ; U5.24 pad.2@53.76,48.475 ; pad.3@51.943,61.595 U5.100@52.985,61.595 ; v2(52.503,62.503) 52.553,62.553 53.055,62.553 U5.100 ; 52.83,61.595 cw(c52.83,61.3) U5.100@53.039,61.509 ; v2(53.978,66.278) 53.971,66.285 53.971,69.249 55.95,71.228 U12.1 ; pad.5@59.375,44.97 ccw(c58.942,45.403) 59.555,45.403 ccw(c60.168,45.403) pad.5@59.735,44.97 ; pad.5 U5.39 ; pad.9@59.563,59.563 U5.87@59.563,61.517 ; pad.6 65.055,47.72 U5.50 ; pad.23 64.46,50.475 U5.56 C27.2@71.098,50.475 ; U5.66@66.581,55.499 U5.66 64.032,55.475 pad.33 62.738,57.658 pad.21 64.555,59.475 U5.74 C11.2@71.335,59.475 ; U5.52 68.05,48.475 ; pad.24@68.05,45.05 68.05,48.475 ; C10.2@69.137,59.514 C10.2 ; C25.2@71.081,48.475 68.05,48.475 ; C11.2@71.191,59.889 ccw(c71.013,60.203) v2@71.374,60.203 ; C11.2 v2@71.374,60.203 ; v2@71.458,60.174 cw(c71.099,59.815) C11.2@71.474,59.473 ; C11.2@71.557,59.889 cw(c71.735,60.203) v2@71.374,60.203 ; C11.2@71.646,59.986 cw(c71.296,59.636) C11.2@71.661,59.302 ; v2(71.754,59.878) 71.428,60.203 v2@71.374,60.203 ; v2(71.804,66.928) 71.804,66.254 v2(72.907,65.15) ; v2(71.804,71.428) 71.875,71.428 72.075,71.628 U13.1 ; C11.2@71.834,59.798 cw(c71.492,59.456) C11.2@71.849,59.131 ; U8.4 43.175,51.943 45.847,51.943 46.306,51.484
  Top Layer w1: pad.20@42.775,48.925 45.175,48.925 U7.5@45.175,47.1
  Bottom Layer w0.254: C19.2 49.188,48.475 pad.2@53.76,48.475 ; C15.2 C14.2 pad.3@51.943,61.595 ; v2(52.503,62.503) 53.978,63.978 v2(53.978,66.278) ; pad.5 60.403,45.638 C22.2 C23.2@60.403,48.125 ; pad.9@59.563,59.563 61.038,59.563 C13.2 ; C28.2 C29.2 pad.33 pad.33@62.877,56.769 ; C29.2@62.474,55.735 ccw(c61.838,56.371) 62.738,56.371 ccw(c63.638,56.371) C29.2@63.002,55.735 ; pad.6 64.05,49.05 C21.2 ; C20.2 C21.2@65.102,48.05 ; v2(71.754,59.878) 72.907,61.031 v2(72.907,65.15) ; v2(71.804,66.928) v2(71.804,71.428)
pads on no net: P4.4 U5.2 U5.3 U5.4 U5.5 U5.6 U5.7 U5.8 U5.11 U5.13 U5.16 U5.19 U5.20 U5.21 U5.22 U5.23 U5.26 U5.27 U5.28 U5.29 U5.30 U5.31 U5.32 U5.33 U5.34 U5.35 U5.36 U5.40 U5.41 U5.42 U5.43 U5.44 U5.45 U5.53 U5.57 U5.58 U5.59 U5.60 U5.61 U5.62 U5.63 U5.64 U6.4 U7.4 U8.1

## Polygon pours and split planes (outlines as drawn)
GND on Top Layer "Bottom Layer-No Net" (solid, pour order 4): 28.057,79.315 28.007,79.25 28.007,37.6 76.507,37.6 76.507,79.348 28.007,79.348
GND on Bottom Layer "Bottom Layer-No Net" (solid, pour order 6): 27.932,79.348 27.932,37.6 76.457,37.6 76.407,37.665 76.407,79.315 27.957,79.315 27.932,79.348
VCC_3_3 on VCC_3_3 (split plane): 76.515,38.185 41.01,38.185 41.01,76.865 76.515,76.865
VCC_3_3 on VCC_3_3 (split plane): 76.515,77.885 40.5,77.885 40.4,77.876 40.305,77.847 40.216,77.799 40.139,77.736 40.076,77.659 40.028,77.57 39.999,77.475 39.99,77.375 39.99,38.185 28.21,38.185 28.161,79.39 76.515,79.39
VCC_1_5 on VCC_1_5 (split plane): 76.515,38.185 41.01,38.185 41.01,76.865 76.515,76.865
VCC_1_5 on VCC_1_5 (split plane): 76.515,77.885 40.5,77.885 40.4,77.876 40.305,77.847 40.216,77.799 40.139,77.736 40.076,77.659 40.028,77.57 39.999,77.475 39.99,77.375 39.99,38.185 28.21,38.185 28.161,79.39 76.515,79.39

## Silkscreen, mask and mechanical layers (free items; w line width, h text height)
Top Overlay:
  text "VCC" at 72.721,67.497 h0.51 r90
  text "P84" at 69.7,65.575 h0.51
  text "P90" at 61.85,65.55 h0.51
  text "P86" at 64.425,65.55 h0.51
  text "P85" at 67.05,65.55 h0.51
  text "Data" at 41.125,65.525 h0.51
  text "Comp" at 43.775,65.525 h0.51
  text "RSS_EN" at 46.125,65.525 h0.51
  text "P94" at 51.775,65.525 h0.51
  text "P91" at 59.325,65.525 h0.51
  text "P95" at 49.375,65.5 h0.51
  text "P93" at 54.25,65.5 h0.51
  text "P92" at 56.75,65.5 h0.51
  text "GND" at 72.771,64.897 h0.51 r90
  text "D9" at 72.644,62.357 h0.51 r90
  text "D8" at 72.656,59.878 h0.51 r90
  text "D7" at 72.644,57.531 h0.51 r90
  text "D6" at 72.771,55.118 h0.51 r90
  text "D5" at 72.771,52.578 h0.51 r90
  text "D4" at 72.675,49.65 h0.51 r90
  text "D3" at 72.771,47.498 h0.51 r90
  text "D2" at 72.771,44.958 h0.51 r90
  text "D1" at 72.771,42.291 h0.51 r90
  text "D0" at 72.771,39.878 h0.51 r90
  text "VCC" at 48.6,38.4 h0.51
  text "GND" at 51.175,38.4 h0.51
Mechanical 1:
  lines w0.889: 27.6,37.6 77.125,37.6 77.125,79.9 27.625,79.9 27.625,37.625

## Text inside footprints (layer, text, board x,y; h text height)
P4: Top Overlay "10" at 69.375,41.95 h0.51; Top Overlay "9" at 69.55,39.375 h0.51; Top Overlay "1" at 54.925,39.45 h0.51; Top Overlay "2" at 54.81,41.682 h0.51